# Altium PCB ART_CARD Rev 5.PcbDoc (part 4 of 13)
Units mil, origin at the board's own origin, x right, y up, seen from the top; angles counter-clockwise.
Board outline 6600.39 x 3903.54 mil, 8 copper layers (Top, Inner Layer 2, Inner Layer 3, Inner Layer 4, Inner Layer 5, Inner Layer 6, Inner Layer 7, Bottom), stack 63.111 mil thick; 542 components, 382 nets, 2410 pads, 1433 vias.
Unrouted connection lines stored in the file: 1247.
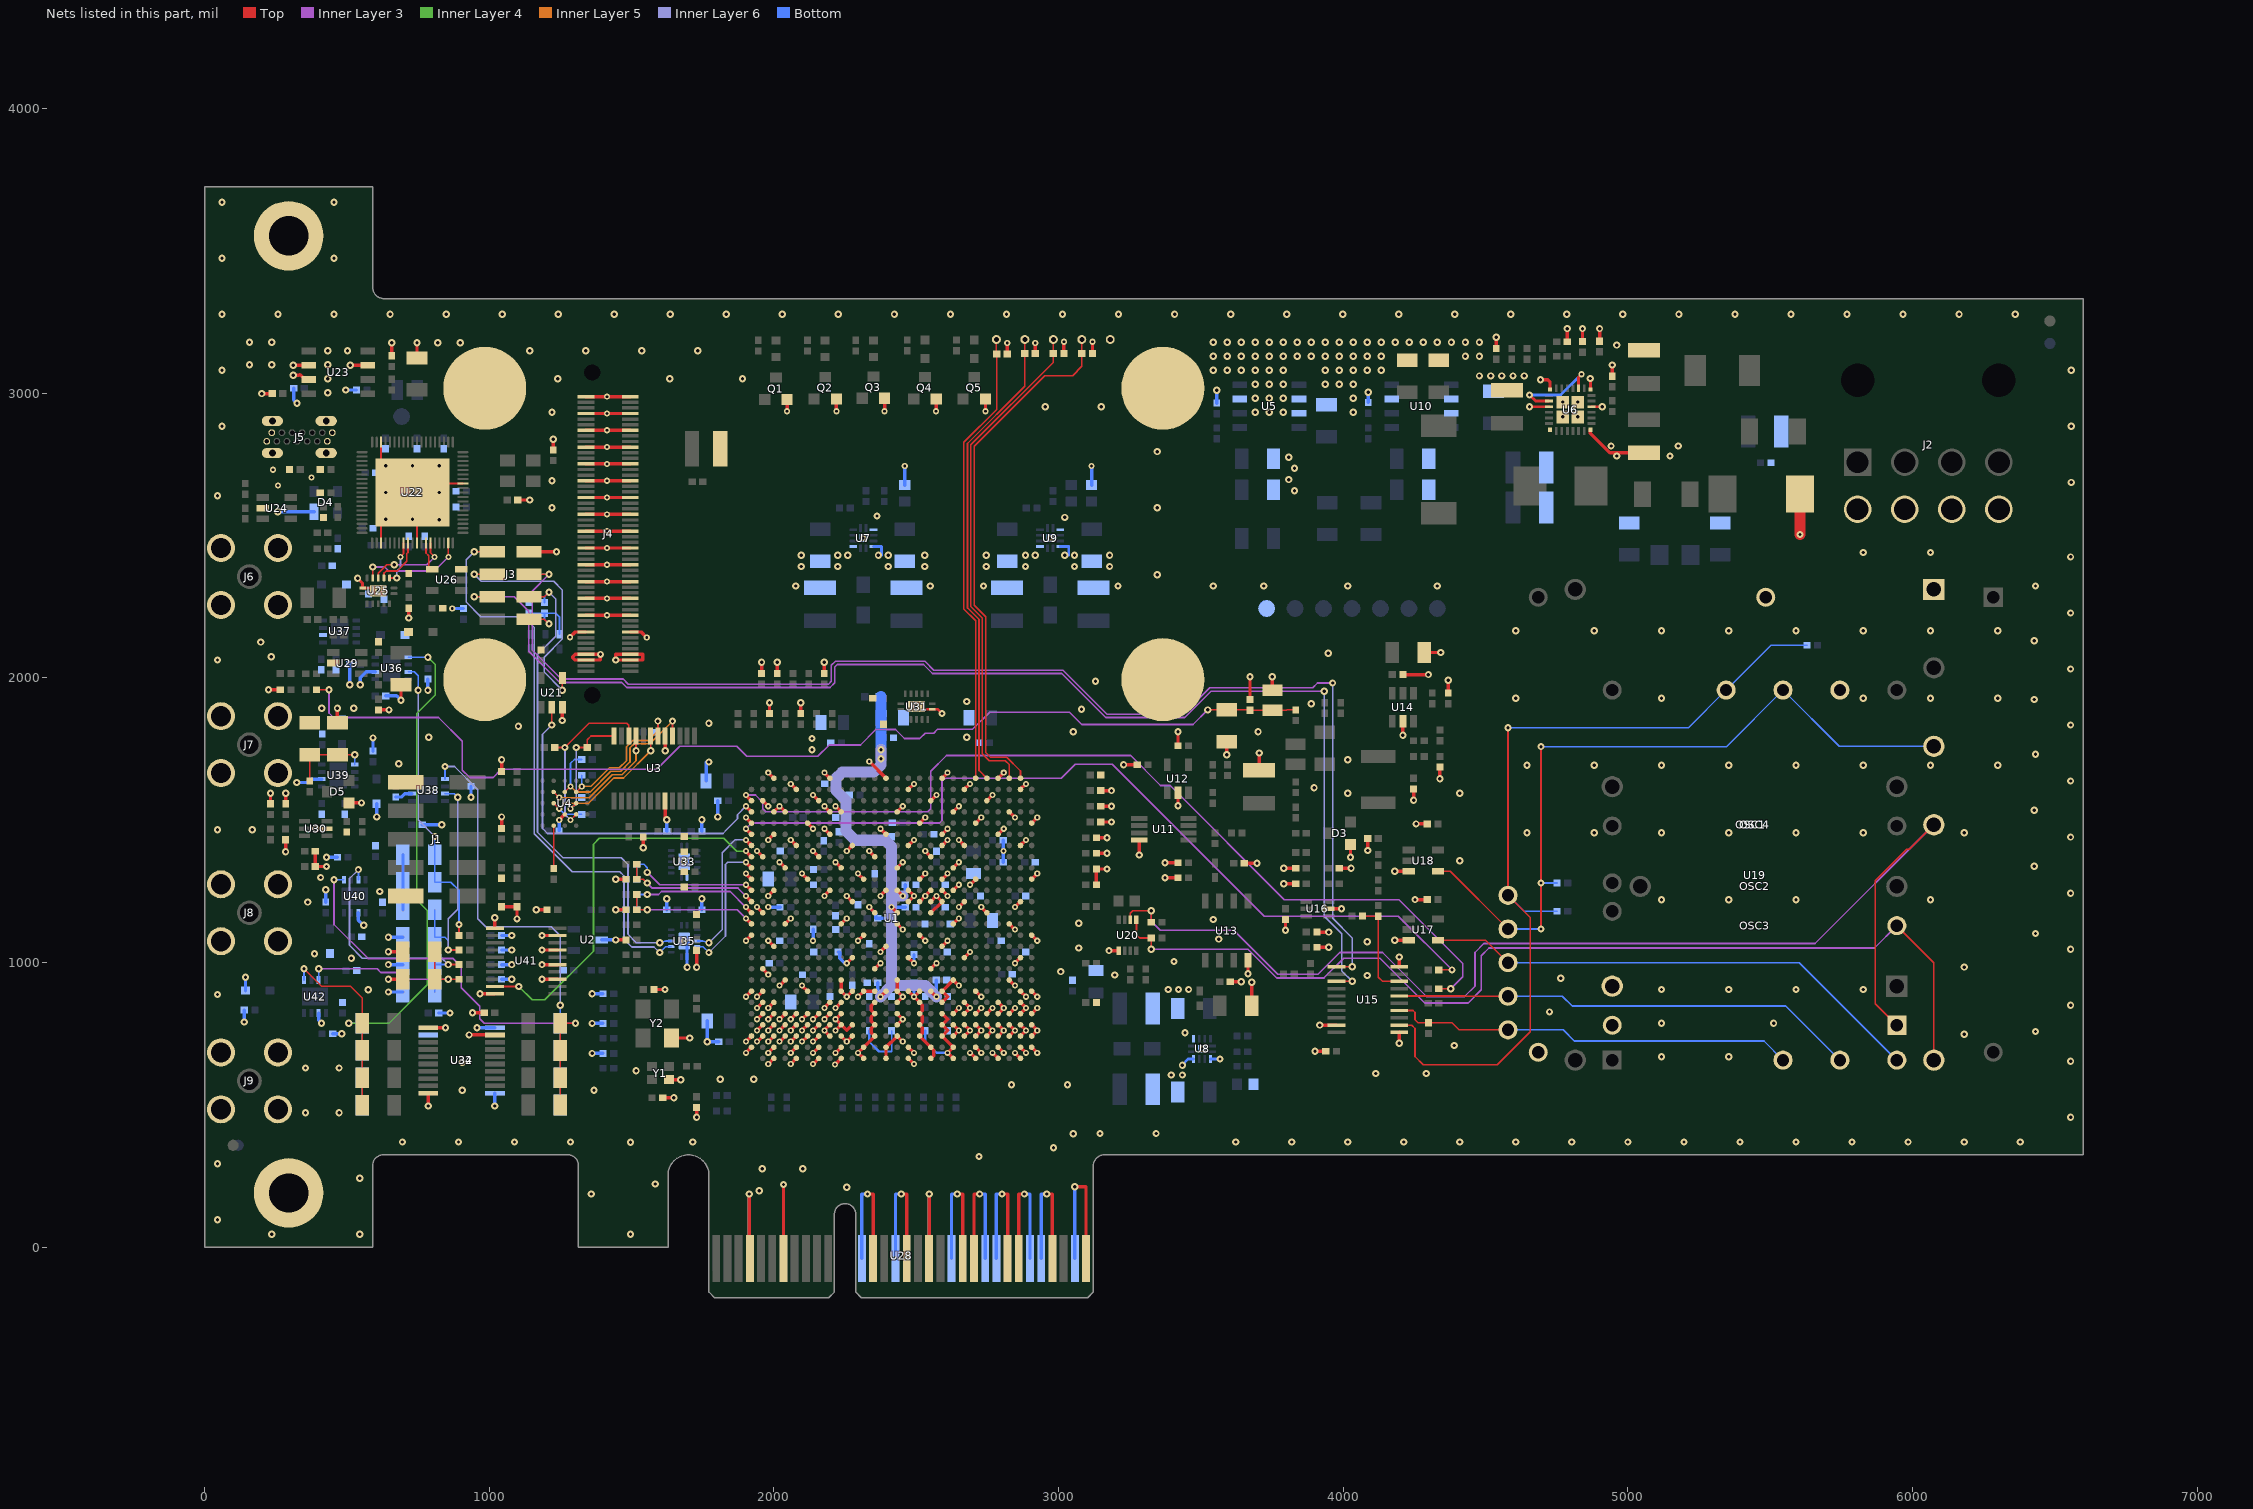
[diagram p10: the nets of this part, all layers, seen from the top]

## Via types
v1: diameter 25.59, hole 11.81, Top to Bottom, 915 vias
v2: diameter 21.65, hole 9.84, Top to Bottom, 518 vias

## Nets (pads, with @x,y where several pads share a name; then routed paths per layer and width w, separated by ;. In a path a pad name is that pad's centre, name@x,y a point inside that pad or via, vN(x,y) a via of type N, cw(c..) or ccw(c..) an arc to the next point about the centre after c; other vN are vias at no path point) (continued)
F_1.8V: C31.1 C32.1 C33.1 C34.1 C35.1 C36.1 L1.2 U1.K20 U1.N11 U1.N13 U1.P20 | length 1944.1
  Top w11.81: v2(2374.02,879.92) U1.P20@2393.7,899.61 ; v2(2413.39,1194.88) U1.N13@2433.07,1175.2 ; U1.N11@2433.07,1253.94 v2(2452.76,1234.25) ; U1.K20@2551.18,899.61 v2(2570.87,879.92)
  Inner Layer 6 w39.37: v2(2374.02,879.92) 2413.39,919.29 ; v1(2375.98,1748.03) v1(2375.98,1716.54) 2375.98,1693.9 2351.38,1669.29 2240.16,1669.29 2218.5,1647.64 2218.5,1604.33 2252.95,1569.88 2252.95,1462.6 2285.43,1430.12 2390.75,1430.12 2413.39,1407.48 2413.39,1234.25 ; v2(2452.76,1234.25) 2413.39,1234.25 ; v2(2570.87,879.92) 2531.5,919.29 2413.39,919.29 ; 2413.39,919.29 v2(2413.39,1194.88) 2413.39,1234.25
  Bottom w11.81: C32.1@2365.16,929.13 2365.16,905.51 2374.02,896.65 v2(2374.02,879.92) ; L1.2@2370.08,1934.06 L1.2@2375.98,1934.06 ; v1@2375.98,1757.87 2382.87,1764.76 C33.1@2382.87,1790.35 ; v2(2413.39,1194.88) C31.1@2461.61,1194.88 ; v2(2452.76,1234.25) 2461.61,1243.11 C34.1@2461.61,1273.62 ; C36.1@2569.88,938.98 2570.87,937.99 v2(2570.87,879.92)
  Bottom w39.37: v1(2375.98,1716.54) v1(2375.98,1748.03) 2375.98,1757.87 C35.1@2375.98,1860.24 L1.2@2375.98,1934.06
F_IN: C186.1 R161.1 R162.1 U39.5 | length 285.4
  Top w5.91: C186.1@369.09,1637.8 R162.1@369.09,1730.31 R161.1@466.54,1730.31 v1(527.56,1730.31)
  Bottom w5.91: U39.5@527.56,1695.87 v1(527.56,1730.31)
FL_CLK: R56.1 U3.10 U4.B2 | length 626.1
  Top w5.91: R56.1@1230.32,1755.91 v1(1265.75,1755.91) 1350.39,1840.55 1483.27,1840.55 1490.16,1833.66 U3.10@1490.16,1796.26 ; v2(1285.43,1500.98) U4.B2@1305.12,1520.67
  Inner Layer 6 w5.91: v1(1265.75,1755.91) 1265.75,1520.67 v2(1285.43,1500.98)
FL_CSN: R58.1 U3.12 U4.C2 | length 418.3
  Top w5.91: v2(1285.43,1540.35) U4.C2@1305.12,1560.04 ; v1(1305.12,1755.91) R58.1@1344.49,1755.91 1344.49,1783.46 1357.28,1796.26 U3.12@1438.98,1796.26
  Inner Layer 6 w5.91: v2(1285.43,1540.35) 1305.12,1560.04 v1(1305.12,1755.91)
FL_D0: R48.1 U3.4 U4.D3 | length 704.2
  Top w5.91: U4.D3@1265.75,1599.41 v2(1285.43,1619.09) ; U3.4@1643.7,1796.26 v1(1643.7,1848.43)
  Inner Layer 5 w5.91: v2(1285.43,1619.09) 1305.12,1599.41 1354.33,1599.41 1427.17,1672.24 1461.61,1672.24 1494.09,1704.72 1494.09,1753.94 1508.86,1768.7 1563.98,1768.7 v1(1643.7,1848.43)
  Bottom w5.91: v2(1285.43,1619.09) 1285.43,1699.8 1299.21,1713.58 R48.1@1324.8,1713.58
FL_D1: R51.1 U3.6 U4.D2 | length 531.1
  Top w5.91: U4.D2@1305.12,1599.41 v2(1324.8,1619.09) ; U3.6@1592.52,1796.26 v1(1592.52,1848.43)
  Inner Layer 5 w5.91: v2(1324.8,1619.09) 1357.28,1619.09 1422.24,1684.06 1456.69,1684.06 1482.28,1709.65 1482.28,1758.86 1503.94,1780.51 1559.06,1780.51 1592.52,1813.98 v1(1592.52,1848.43)
  Bottom w5.91: v2(1324.8,1619.09) R51.1@1324.8,1658.46
FL_D2: R53.1 U3.7 U4.C4 | length 572.2
  Top w5.91: U4.C4@1226.38,1560.04 v2(1246.06,1540.35) ; v1(1566.93,1744.09) U3.7@1566.93,1796.26
  Inner Layer 5 w5.91: v2(1246.06,1540.35) 1265.75,1560.04 1348.43,1560.04 1437.01,1648.62 1471.46,1648.62 v1(1566.93,1744.09)
  Bottom w5.91: v2(1246.06,1540.35) 1265.75,1520.67 R53.1@1324.8,1520.67
FL_D3: R55.1 U3.9 U4.D4 | length 516.7
  Top w5.91: U4.D4@1226.38,1599.41 v2(1246.06,1579.72) ; v1(1515.75,1744.09) U3.9@1515.75,1796.26
  Inner Layer 5 w5.91: v2(1246.06,1579.72) 1351.38,1579.72 1432.09,1660.43 1466.54,1660.43 1515.75,1709.65 v1(1515.75,1744.09)
  Bottom w5.91: v2(1246.06,1579.72) R55.1@1324.8,1579.72
FL_RSTN: R62.2 U4.A4 | length 150.6
  Top w5.91: R62.2@1226.38,1330.71 U4.A4@1226.38,1481.3
FREQ_IN: U1.AF8 U41.9 | length 1403.5
  Top w5.91: U41.9@1019.69,916.34 v1(1103.35,916.34)
  Top w11.81: v2(1901.57,1391.73) U1.AF8@1921.26,1372.05
  Inner Layer 4 w5.91: v1(1103.35,916.34) 1150.59,869.09 1194.88,869.09 1366.14,1040.35 1366.14,1416.34 1386.81,1437.01 1823.82,1437.01 1869.09,1391.73 v2(1901.57,1391.73)
FREQ_OUT: C133.2 C136.1 C172.1 L13.1 R98.2 | length 3865.7
  Top w5.91: C172.1@392.72,1958.66 v1(437.01,1958.66) ; v1(3523.62,1887.8) R98.2@3590.55,1887.8 3671.26,1887.8 C136.1@3672.24,1886.81 3672.83,1886.22 L13.1@3750.98,1886.22 3800.59,1886.22 3802.17,1887.8 C133.2@3832.68,1887.8
  Inner Layer 3 w5.91: v1(437.01,1958.66) 437.01,1876.97 452.76,1861.22 821.85,1861.22 905.51,1777.56 905.51,1676.18 931.1,1650.59 1013.78,1650.59 1042.32,1679.13 1588.58,1679.13 1669.29,1759.84 1869.09,1759.84 1904.53,1724.41 2153.54,1724.41 2193.9,1764.76 2304.13,1764.76 2358.27,1818.9 2427.17,1818.9 2458.66,1787.4 2512.8,1787.4 2531.5,1806.1 2561.02,1806.1 2574.8,1819.88 2697.83,1819.88 2757.87,1879.92 3038.39,1879.92 3081.69,1836.61 3472.44,1836.61 v1(3523.62,1887.8)
GND: C1.2 C2.2 C3.2 C4.2 C5.2 C6.2 C7.2 C8.2 C9.2 C10.2 C11.2 C12.2 C13.2 C14.2 C15.2 C16.2 C17.2 C18.2 C19.2 C20.2 C21.2 C22.2 C23.2 C24.2 C25.2 C26.2 C27.2 C28.2 C29.2 C30.2 C31.2 C32.2 C33.2 C34.2 C35.2 C36.2 C37.2 C38.2 C39.2 C40.2 C41.2 C42.2 C43.2 C44.2 C45.2 C46.2 C47.2 C48.2 C49.2 C50.2 C51.2 C52.2 C53.2 C54.2 C55.2 C56.2 C57.2 C58.2 C59.2 C60.2 C61.2 C62.2 C63.2 C64.2 C65.2 C66.2 C67.2 C68.2 C69.2 C70.2 C71.2 C72.2 C73.2 C74.2 C75.2 C76.2 C77.2 C78.2 C79.2 C80.2 C81.2 C82.2 C83.2 C84.2 C85.2 C86.2 C87.2 C88.2 C89.2 C90.2 C91.2 C93.2 C94.2 C95.2 C96.2 C97.2 C98.2 C100.2 C101.2 C103.2 C104.2 C105.2 C106.2 C107.2 C108.2 C110.2 C111.2 C112.2 C113.2 C114.2 C115.2 C116.2 C117.2 C118.2 C119.2 C120.2 C121.2 C122.2 C123.2 C124.2 C125.2 C126.2 C127.2 C128.2 C130.2 C131.2 C134.2 C135.2 C136.2 C137.2 C139.2 C140.2 C141.2 C143.2 C144.2 C145.2 C146.2 C147.2 C148.2 C149.2 C150.2 C151.2 C152.2 C153.2 C154.2 C155.2 C156.2 C157.2 C158.2 C159.2 C160.2 C161.2 C162.2 C163.2 C164.2 C165.2 C166.2 C167.2 C168.2 C169.2 C170.2 C171.2 C175.2 C184.2 C185.2 C187.2 C188.2 C189.2 C190.2 C191.2 C192.2 C193.2 C194.2 C195.2 C196.2 C197.2 C198.2 C199.2 C200.2 C201.2 C202.2 C203.2 C204.2 C205.2 C206.2 C207.2 C208.2 C209.2 C210.2 C211.2 C212.2 C213.2 C214.2 C215.2 C216.2 C217.2 C218.2 C219.2 C220.2 C221.2 C222.2 D3.1 D4.1 D5.1 D6.1 D7.1 H1.1 H2.1 HE1.1 HE2.1 HE3.1 HE4.1 J1.2 J1.10 J2.5 J2.6 J2.7 J2.8 J3.8 J4.1 J4.2 J4.7 J4.8 J4.13 J4.14 J4.19 J4.20 J4.25 J4.26 J4.31 J4.32 J4.37 J4.38 J4.43 J4.44 J4.49 J4.50 J4.55 J4.56 J4.61 J4.62 J4.67 J4.68 J4.73 J4.74 J4.79 J4.80 J4.85 J4.86 J4.93 J4.94 J4.95 J4.96 J5.A1 J5.A12 J5.B1 J5.B12 J5.C1 J5.C2 J5.C3 J5.C4 J6.2 J6.3 J6.4 J6.5 J7.2 J7.3 J7.4 J7.5 J8.2 J8.3 J8.4 J8.5 J9.2 J9.3 J9.4 J9.5 J10.2 L13.2 OSC1.2 OSC1.4 OSC2.6 OSC3.5 OSC4.1 PD3.1 Q1.2 Q2.2 Q3.2 Q4.2 Q5.2 R6.1 R7.1 R9.1 R13.1 R24.2 R25.2 R26.2 R27.2 R28.2 R29.2 R30.2 R31.2 R41.2 R42.2 R43.2 R44.2 R46.1 R47.1 R50.1 R52.1 R54.1 R57.1 R59.1 R60.1 R61.1 R66.2 R67.2 R70.2 R71.2 R73.2 R76.2 R79.2 R82.2 R89.1 R96.2 R98.1 R114.2 R115.2 R116.2 R124.1 R125.2 R126.2 R129.1 R132.2 R136.2 R139.1 R148.2 R158.2 R159.2 R160.2 R161.2 R162.2 R179.1 R180.1 R181.1 R182.1 R183.1 R184.1 R186.2 R187.2 R188.2 R190.2 R191.2 R192.2 R194.2 R195.2 R196.2 R198.2 R199.2 R200.2 TP5.1 U1.A5 U1.A10 U1.A15 U1.A20 U1.A22 U1.A23 U1.A24 U1.A25 U1.AA5 U1.AA10 U1.AA20 U1.AA22 U1.AA23 U1.AA24 U1.AB2 U1.AB7 U1.AB22 U1.AB23 U1.AB24 U1.AB25 U1.AB26 U1.AC4 U1.AC9 U1.AC14 U1.AC19 U1.AC22 U1.AC23 U1.AC24 U1.AD1 U1.AD4 U1.AD6 U1.AD11 U1.AD16 U1.AD21 U1.AD22 U1.AD23 U1.AD24 U1.AD25 U1.AD26 U1.AE3 U1.AE8 U1.AE13 U1.AE18 U1.AE20 U1.AE21 U1.AE22 U1.AE23 U1.AE24 U1.AF5 U1.AF10 U1.AF15 U1.AF20 U1.AF24 U1.AF25 U1.B2 U1.B7 U1.B12 U1.B17 U1.B20 U1.B21 U1.B22 U1.B23 U1.B24 U1.B25 U1.B26 U1.C4 U1.C14 U1.C19 U1.C22 U1.C23 U1.C24 U1.D1 U1.D6 U1.D21 U1.D22 U1.D23 U1.D24 U1.D25 U1.D26 U1.E3 U1.E13 U1.E22 U1.E23 U1.E24 U1.F5 U1.F10 U1.F20 U1.F22 U1.F23 U1.F24 U1.F25 U1.F26 U1.G2 U1.G7 U1.G12 U1.G17 U1.G21 U1.G22 U1.G23 U1.G24 U1.H4 U1.H9 U1.H11 U1.H14 U1.H19 U1.H22 U1.H23 U1.H24 U1.H25 U1.H26 U1.J1 U1.J6 U1.J7 U1.J10 U1.J11 U1.J12 U1.J16 U1.J20 U1.J21 U1.J22 U1.J23 U1.J24 U1.K3 U1.K8 U1.K11 U1.K12 U1.K13 U1.K18 U1.K25 U1.K26 U1.L5 U1.L10 U1.L12 U1.L15 U1.L20 U1.L21 U1.L22 U1.L23 U1.L24 U1.M2 U1.M7 U1.M11 U1.M12 U1.M17 U1.M20 U1.M25 U1.M26 U1.N4 U1.N9 U1.N14 U1.N19 U1.N20 U1.N21 U1.N22 U1.N23 U1.N24 U1.P1 U1.P6 U1.P11 U1.P16 U1.P25 U1.P26 U1.R8 U1.R13 U1.R18 U1.R20 U1.R21 U1.R22 U1.R23 U1.R24 U1.T10 U1.T15 U1.T20 U1.T25 U1.T26 U1.U7 U1.U12 U1.U17 U1.U20 U1.U23 U1.U24 U1.V4 U1.V9 U1.V14 U1.V19 U1.V20 U1.V21 U1.V22 U1.V23 U1.V24 U1.V25 U1.V26 U1.W1 U1.W4 U1.W6 U1.W11 U1.W21 U1.W22 U1.W23 U1.W24 U1.Y3 U1.Y8 U1.Y22 U1.Y23 U1.Y24 U1.Y25 U1.Y26 U2.2 U3.5 U3.20 U4.B3 U5.3 U5.6 U5.7 U6.3 U6.16 U6.25 U6.26 U6.27 U6.28 U6.29 U6.30 U6.31 U6.32 U7.1 U7.4 U7.7 U7.13 U8.1 U8.4 U8.7 U8.13 U9.1 U9.4 U9.7 U9.13 U10.3 U10.6 U10.7 U11.8 U12.2 U13.4 U14.2 U15.1 U15.10 U15.19 U16.2 U17.3 U18.3 U19.8 U20.1 U21.3 U22.3 U22.11 U22.31 U22.55 U22.77 U23.3 U23.6 U23.7 U24.2 U25.7 U25.PAD U26.3 U28.A4 U28.A12 U28.A15 U28.A18 U28.A20 U28.A23 U28.A24 U28.A27 U28.A28 U28.A31 U28.B4 U28.B7 U28.B13 U28.B16 U28.B18 U28.B21 U28.B22 U28.B25 U28.B26 U28.B29 U28.B32 U29.2 U30.2 U31.7 U31.PAD U32.1 U32.10 U32.19 U33.7 U33.PAD U34.1 U34.10 U34.19 U35.7 U35.PAD U36.2 U37.2 U38.2 U39.2 U40.2 U41.1 U41.10 U41.13 U41.15 U41.17 U41.19 U42.2 VR1.2 VR2.2 VR3.2 VR4.2 VR5.2 VR6.2 Y1.2 Y2.2 | length 25010.1
  Top w7.87: U22.3@620.08,2474.41 620.08,2557.09 U22.77@620.08,2651.57 ; U22.55@620.08,2828.74 620.08,2746.06 U22.77@620.08,2651.57 ; U22.11@746.06,2474.41 746.06,2557.09 746.06,2651.57 v1(730.32,2651.57) ; U22.31@907.48,2683.07 730.32,2683.07 v1(730.32,2651.57) ; U22.77@620.08,2651.57 v1(635.83,2651.57) v1(730.32,2651.57)
  Top w9.84: v1(537.4,2350.39) 555.12,2332.68 U25.7@555.12,2315.94 624.02,2315.94 v2(610.24,2306.1) ; v2(2500.98,1899.61) 2500.98,1889.76 U31.7@2556.1,1889.76 2575.79,1889.76 v1(2590.55,1875) ; v1(4654.53,2952.76) U6.3@4722.44,2952.76 ; U6.31@4868.11,3013.78 v1(4868.11,3052.17) ; U6.16@4872.05,2952.76 v1(4909.45,2952.76)
  Top w11.81: v1(200.79,2999.02) C163.2@237.2,2999.02 ; v1(224.41,1958.66) R148.2@265.75,1958.66 ; R158.2@231.3,1558.07 v1(231.3,1594.49) ; v1(284.45,1389.76) R160.2@284.45,1432.09 ; C187.2@285.43,1558.07 v1(285.43,1594.49) ; v1(311.02,3062.99) 331.5,3062.99 333.46,3064.96 335.24,3064.96 351.38,3048.82 U23.7@365.16,3048.82 ; v1(311.02,3098.43) 331.69,3098.43 332.09,3098.82 U23.6@365.16,3098.82 ; C185.2@388.78,1390.75 C184.2@388.78,1337.6 v1(428.15,1337.6) ; v1(390.75,1470.47) U30.2@430.12,1470.47 ; R161.2@466.54,1842.52 v1(466.54,1893.7) ; D5.1@506.89,1561.02 v1(551.18,1561.02) ; v1(511.81,3098.43) 512.2,3098.82 U23.3@573.82,3098.82 ; C175.2@611.22,1887.8 v1(647.64,1887.8) ; v1(645.67,941.93) R199.2@696.85,941.93 ; v1(645.67,1038.39) R198.2@696.85,1038.39 ; R136.2@657.48,3131.89 v1(657.48,3177.17) ; v1(689.96,1921.26) C171.2@689.96,1976.38 ; v1(717.52,2210.63) C169.2@717.52,2245.08 ; C164.2@746.06,3124.02 v1(746.06,3177.17) ; v1(785.43,496.06) 785.43,541.14 U34.10@785.63,541.34 ; U34.1@785.63,771.65 v1(846.46,771.65) ; v1(929.13,746.06) U34.19@1019.49,746.06 ; v1(940.94,823.82) C205.2@982.28,823.82 ; v1(967.52,890.75) U41.10@1019.69,890.75 ; U41.1@1019.69,1121.06 v1(1019.69,1157.48) ; C79.2@1043.31,1195.87 R42.2@1097.44,1195.87 v1(1097.44,1153.54) ; C82.2@1043.31,1471.46 v1(1043.31,1511.81) ; C78.2@1043.31,1671.26 v1(1043.31,1712.6) ; C166.2@1100.39,2625 v1(1141.73,2625) ; J3.8@1139.17,2442.91 v1(1236.22,2442.91) ; v1(1165.35,1186.02) C218.2@1202.76,1186.02 ; v1(1185.04,941.93) U41.13@1240.16,941.93 ; v1(1185.04,993.11) U41.15@1240.16,993.11 ; v1(1185.04,1044.29) U41.17@1240.16,1044.29 ; v1(1185.04,1095.47) U41.19@1240.16,1095.47 ; C165.2@1224.41,2801.18 v1(1224.41,2838.58) ; v2(1246.06,1500.98) U4.B3@1265.75,1520.67 ; v1(1256.89,1850.39) U21.3@1256.89,1897.64 ; v2(1283.46,2142.72) 1302.17,2161.42 J4.85@1339.57,2161.42 ; J4.79@1339.57,2220.47 v2(1413.39,2220.47) J4.80@1495.08,2220.47 ; J4.73@1339.57,2279.53 v2(1413.39,2279.53) J4.74@1495.08,2279.53 ; J4.67@1339.57,2338.58 1341.54,2338.58 v2(1413.39,2338.58) J4.68@1495.08,2338.58 ; J4.61@1339.57,2397.64 v2(1413.39,2397.64) J4.62@1495.08,2397.64 ; J4.55@1339.57,2456.69 v2(1413.39,2456.69) J4.56@1495.08,2456.69 ; J4.49@1339.57,2515.75 v2(1413.39,2515.75) J4.50@1495.08,2515.75 ; J4.43@1339.57,2574.8 v2(1413.39,2574.8) J4.44@1495.08,2574.8 ; J4.37@1339.57,2633.86 v2(1413.39,2633.86) J4.38@1495.08,2633.86 ; J4.31@1339.57,2692.91 v2(1413.39,2692.91) J4.32@1495.08,2692.91 ; J4.25@1339.57,2751.97 v2(1413.39,2751.97) J4.26@1495.08,2751.97 ; J4.19@1339.57,2811.02 v2(1413.39,2811.02) J4.20@1495.08,2811.02 ; J4.13@1339.57,2870.08 v2(1413.39,2870.08) J4.14@1495.08,2870.08 ; J4.7@1339.57,2929.13 v2(1413.39,2929.13) J4.8@1495.08,2929.13 ; J4.1@1339.57,2988.19 v2(1413.39,2988.19) J4.2@1495.08,2988.19 ; v1(1443.9,1079.72) R27.2@1480.32,1079.72 ; v1(1443.9,1186.02) R28.2@1480.32,1186.02 ; v1(1443.9,1293.31) R30.2@1480.32,1293.31 ; J4.86@1495.08,2161.42 1533.46,2161.42 v2(1553.15,2141.73) ; v1(1541.34,1403.54) R47.1@1541.34,1440.94 ; C85.2@1578.74,905.51 v1(1617.13,905.51) ; C80.2@1609.25,525.59 v1(1648.62,525.59) ; U3.20@1618.11,1567.91 1618.11,1506.89 v1(1623.03,1501.97) ; v1(1618.11,1744.09) U3.5@1618.11,1796.26 ; Y1.2@1630.91,588.58 v1(1672.24,588.58) ; Y2.2@1640.55,735.24 v1(1704.72,735.24) ; v1(1728.35,456.69) R46.1@1728.35,491.14 ; v1(1728.35,983.27) R184.1@1728.35,1043.31 ; v2(1901.57,683.07) U1.AF25@1921.26,702.76 ; v2(1901.57,722.44) U1.AF24@1921.26,742.13 ; v2(1901.57,879.92) U1.AF20@1921.26,899.61 ; v2(1901.57,1076.77) U1.AF15@1921.26,1096.46 ; v2(1901.57,1312.99) U1.AF10@1921.26,1293.31 ; v2(1901.57,1509.84) U1.AF5@1921.26,1490.16 ; v1(1913.39,187.01) 1913.39,-39.37 U28.B4@1915.35,-39.37 ; v2(1940.94,722.44) U1.AE24@1960.63,742.13 ; v2(1940.94,761.81) U1.AE23@1960.63,781.5 ; v2(1940.94,801.18) U1.AE22@1960.63,820.87 ; v2(1940.94,840.55) U1.AE21@1960.63,860.24 ; v2(1940.94,879.92) U1.AE20@1960.63,899.61 ; v2(1940.94,1194.88) U1.AE13@1960.63,1175.2 ; v2(1940.94,1391.73) U1.AE8@1960.63,1372.05 ; R13.1@1956.69,2015.75 v1(1956.69,2055.12) ; U1.AE18@1960.63,978.35 v2(1980.32,957.68) ; U1.AE3@1960.63,1568.9 v2(1980.32,1549.21) ; v2(1980.32,643.7) U1.AD26@2000,663.39 ; v2(1980.32,683.07) U1.AD25@2000,702.76 ; v2(1980.32,722.44) U1.AD24@2000,742.13 ; v2(1980.32,761.81) U1.AD23@2000,781.5 ; v2(1980.32,801.18) U1.AD22@2000,820.87 ; v2(1980.32,840.55) U1.AD21@2000,860.24 ; v2(1980.32,1076.77) U1.AD16@2000,1057.09 ; v2(1980.32,1234.25) U1.AD11@2000,1253.94 ; v2(1980.32,1431.1) U1.AD6@2000,1450.79 ; v2(1980.32,1667.32) U1.AD1@2000,1647.64 ; R43.2@1984.25,1875 v1(1984.25,1913.39) ; U1.AD4@2000,1529.53 v2(2019.69,1549.21) U1.AC4@2039.37,1529.53 ; R41.2@2011.81,2015.75 v1(2011.81,2055.12) ; v2(2019.69,722.44) U1.AC24@2039.37,742.13 ; v2(2019.69,761.81) U1.AC23@2039.37,781.5 ; v2(2019.69,801.18) U1.AC22@2039.37,820.87 ; v2(2019.69,919.29) U1.AC19@2039.37,938.98 ; v2(2019.69,1352.36) U1.AC9@2039.37,1332.68 ; U28.B7@2033.46,-39.37 v1(2033.46,220.47) ; U1.AC14@2039.37,1135.83 v2(2059.06,1155.51) ; v2(2046.26,2937.01) Q1.2@2046.26,2978.35 ; v2(2059.06,643.7) U1.AB26@2078.74,663.39 ; v2(2059.06,683.07) U1.AB25@2078.74,702.76 ; v2(2059.06,722.44) U1.AB24@2078.74,742.13 ; v2(2059.06,761.81) U1.AB23@2078.74,781.5 ; v2(2059.06,801.18) U1.AB22@2078.74,820.87 ; v2(2059.06,1431.1) U1.AB7@2078.74,1411.42 ; v2(2059.06,1627.95) U1.AB2@2078.74,1608.27 ; R44.2@2094.49,1875 v1(2094.49,1913.39) ; v2(2098.43,722.44) U1.AA24@2118.11,742.13 ; v2(2098.43,761.81) U1.AA23@2118.11,781.5 ; v2(2098.43,801.18) U1.AA22@2118.11,820.87 ; v2(2098.43,919.29) U1.AA20@2118.11,899.61 ; v2(2098.43,1312.99) U1.AA10@2118.11,1293.31 ; U1.AA5@2118.11,1490.16 v2(2137.8,1470.47) ; v2(2137.8,643.7) U1.Y26@2157.48,663.39 ; v2(2137.8,683.07) U1.Y25@2157.48,702.76 ; v2(2137.8,722.44) U1.Y24@2157.48,742.13 ; v2(2137.8,761.81) U1.Y23@2157.48,781.5 ; v2(2137.8,801.18) U1.Y22@2157.48,820.87 ; v2(2137.8,1391.73) U1.Y8@2157.48,1372.05 ; v2(2137.8,1588.58) U1.Y3@2157.48,1568.9 ; v2(2177.17,801.18) U1.W22@2196.85,820.87 ; v2(2177.17,840.55) U1.W21@2196.85,860.24 ; v2(2177.17,1234.25) U1.W11@2196.85,1253.94 ; v2(2177.17,1470.47) U1.W6@2196.85,1450.79 ; v2(2177.17,1549.21) U1.W4@2196.85,1529.53 ; v2(2177.17,1667.32) U1.W1@2196.85,1647.64 ; R9.1@2177.17,2015.75 v1(2177.17,2055.12) ; U1.W24@2196.85,742.13 v2(2177.17,761.81) U1.W23@2196.85,781.5 ; v2(2214.57,641.73) U1.V26@2236.22,663.39 ; v2(2216.54,683.07) U1.V25@2236.22,702.76 ; v2(2216.54,761.81) U1.V23@2236.22,781.5 ; v2(2216.54,840.55) U1.V21@2236.22,860.24 ; v2(2216.54,1352.36) U1.V9@2236.22,1332.68 ; v2(2216.54,1549.21) U1.V4@2236.22,1529.53 ; v2(2219.49,2937.01) Q2.2@2219.49,2980.31 ; U1.V24@2236.22,742.13 v2(2255.91,722.44) U1.U24@2275.59,742.13 ; U1.V22@2236.22,820.87 v2(2216.54,801.18) U1.V23@2236.22,781.5 ; U1.V19@2236.22,938.98 U1.V20@2236.22,899.61 v2(2255.91,879.92) U1.U20@2275.59,899.61 ; U1.V14@2236.22,1135.83 v2(2255.91,1155.51) ; v2(2255.91,998.03) U1.U17@2275.59,1017.72 ; v2(2255.91,1234.25) U1.U12@2275.59,1214.57 ; v2(2255.91,1391.73) U1.U7@2275.59,1411.42 ; U1.U23@2275.59,781.5 2255.91,761.81 U1.V23@2236.22,781.5 ; v2(2295.28,879.92) U1.T20@2314.96,899.61 U1.R20@2354.33,899.61 ; v2(2295.28,1076.77) U1.T15@2314.96,1096.46 ; v2(2295.28,1312.99) U1.T10@2314.96,1293.31 ; U1.T26@2314.96,663.39 v2(2295.28,683.07) U1.T25@2314.96,702.76 U1.R24@2354.33,742.13 2342.52,753.94 2342.52,769.69 U1.R23@2354.33,781.5 2342.52,793.31 2342.52,809.06 U1.R22@2354.33,820.87 2342.52,832.68 2342.52,848.43 U1.R21@2354.33,860.24 ; v1(2328.74,187.01) 2348.43,187.01 U28.B13@2348.43,-39.37 ; v2(2334.65,1194.88) U1.R13@2354.33,1175.2 ; v2(2334.65,1391.73) U1.R8@2354.33,1372.05 ; v2(2334.65,1706.69) U1.P1@2393.7,1647.64 ; U1.R18@2354.33,978.35 v2(2374.02,998.03) ; v2(2374.02,1037.4) U1.P16@2393.7,1057.09 ; v2(2374.02,1234.25) U1.P11@2393.7,1253.94 ; v2(2374.02,1470.47) U1.P6@2393.7,1450.79 ; v2(2388.78,2937.01) Q3.2@2388.78,2982.28 ; U1.P26@2393.7,663.39 U1.P25@2393.7,702.76 U1.N24@2433.07,742.13 v2(2452.76,722.44) ; U1.N23@2433.07,781.5 v2(2452.76,801.18) U1.N22@2433.07,820.87 ; U1.N21@2433.07,860.24 v2(2452.76,879.92) U1.N20@2433.07,899.61 U1.N19@2433.07,938.98 ; U1.N14@2433.07,1135.83 v2(2452.76,1116.14) ; U1.N9@2433.07,1332.68 v2(2452.76,1352.36) ; U1.N4@2433.07,1529.53 v2(2452.76,1549.21) ; v1(2446.85,187.01) 2466.54,187.01 U28.B16@2466.54,-39.37 ; U1.M26@2472.44,663.39 v2(2492.13,643.7) ; U1.M25@2472.44,702.76 v2(2492.13,683.07) ; U1.M20@2472.44,899.61 v2(2492.13,879.92) ; U1.M17@2472.44,1017.72 v2(2492.13,998.03) ; U1.M12@2472.44,1214.57 v2(2492.13,1234.25) U1.M11@2472.44,1253.94 ; U1.M7@2472.44,1411.42 v2(2492.13,1431.1) ; U1.M2@2472.44,1608.27 v2(2492.13,1627.95) ; U1.L20@2511.81,899.61 v2(2492.13,879.92) ; U1.L15@2511.81,1096.46 v2(2531.5,1076.77) ; U1.L12@2511.81,1214.57 v2(2531.5,1234.25) U1.K11@2551.18,1253.94 ; U1.L10@2511.81,1293.31 v2(2531.5,1312.99) ; U1.L5@2511.81,1490.16 v2(2531.5,1509.84) ; v2(2531.5,1391.73) U1.K8@2551.18,1372.05 ; U28.B18@2545.28,-39.37 v1(2545.28,187.01) ; U1.K26@2551.18,663.39 2561.02,673.23 2561.02,683.07 2561.02,692.91 U1.K25@2551.18,702.76 U1.L24@2511.81,742.13 2521.65,751.97 2521.65,761.81 2521.65,771.65 U1.L23@2511.81,781.5 2521.65,791.34 2521.65,801.18 2521.65,811.02 U1.L22@2511.81,820.87 2521.65,830.71 2521.65,840.55 2521.65,850.39 U1.L21@2511.81,860.24 v2(2492.13,879.92) ; U1.K18@2551.18,978.35 v2(2570.87,998.03) ; U1.K13@2551.18,1175.2 U1.J12@2590.55,1214.57 v2(2570.87,1234.25) U1.K12@2551.18,1214.57 ; U1.K3@2551.18,1568.9 v2(2570.87,1588.58) ; v2(2569.88,2937.01) Q4.2@2569.88,2980.31 ; U1.J22@2590.55,820.87 2610.24,801.18 U1.J23@2590.55,781.5 2610.24,761.81 U1.J24@2590.55,742.13 U1.H25@2629.92,702.76 v2(2610.24,683.07) U1.H26@2629.92,663.39 ; U1.J21@2590.55,860.24 2610.24,879.92 U1.J20@2590.55,899.61 U1.H19@2629.92,938.98 v2(2649.61,919.29) ; U1.J16@2590.55,1057.09 v2(2610.24,1076.77) ; U1.J11@2590.55,1253.94 v2(2610.24,1234.25) ; U1.J10@2590.55,1293.31 v2(2610.24,1312.99) ; U1.J7@2590.55,1411.42 v2(2610.24,1431.1) ; U1.J6@2590.55,1450.79 v2(2610.24,1470.47) ; U1.J1@2590.55,1647.64 v2(2610.24,1667.32) ; U1.H24@2629.92,742.13 v2(2649.61,761.81) U1.H23@2629.92,781.5 ; U1.H22@2629.92,820.87 v2(2649.61,840.55) ; U1.H14@2629.92,1135.83 v2(2649.61,1155.51) ; U1.H11@2629.92,1253.94 v2(2649.61,1273.62) ; U1.H9@2629.92,1332.68 v2(2649.61,1352.36) ; U1.H4@2629.92,1529.53 v2(2649.61,1549.21) ; v1(2643.7,187.01) 2663.39,187.01 U28.B21@2663.39,-39.37 ; v2(2649.61,1194.88) U1.G12@2669.29,1214.57 ; v2(2649.61,1431.1) U1.G7@2669.29,1411.42 ; U1.G24@2669.29,742.13 v2(2688.98,761.81) U1.G23@2669.29,781.5 ; U1.G22@2669.29,820.87 v2(2688.98,840.55) U1.G21@2669.29,860.24 ; U1.G17@2669.29,1017.72 v2(2688.98,1037.4) ; U1.G2@2669.29,1608.27 v2(2688.98,1627.95) ; v2(2688.98,683.07) U1.F26@2708.66,663.39 ; v2(2688.98,1273.62) U1.F10@2708.66,1293.31 ; U28.B22@2702.76,-39.37 2702.76,187.01 v1(2722.44,187.01) ; U1.F25@2708.66,702.76 v2(2728.35,683.07) ; U1.F24@2708.66,742.13 v2(2728.35,761.81) U1.F23@2708.66,781.5 ; U1.F22@2708.66,820.87 v2(2728.35,840.55) ; U1.F20@2708.66,899.61 v2(2728.35,879.92) ; U1.F5@2708.66,1490.16 v2(2728.35,1509.84) ; v2(2728.35,1194.88) U1.E13@2748.03,1175.2 ; v2(2743.11,2937.01) Q5.2@2743.11,2980.31 ; U1.E24@2748.03,742.13 v2(2767.72,761.81) U1.E23@2748.03,781.5 ; U1.E22@2748.03,820.87 v2(2767.72,840.55) ; U1.E3@2748.03,1568.9 v2(2767.72,1588.58) ; v2(2767.72,683.07) U1.D26@2787.4,663.39 ; U1.D25@2787.4,702.76 v2(2807.09,683.07) ; U1.D24@2787.4,742.13 v2(2807.09,761.81) U1.D23@2787.4,781.5 ; U1.D22@2787.4,820.87 v2(2807.09,840.55) U1.D21@2787.4,860.24 ; U1.D6@2787.4,1450.79 v2(2807.09,1470.47) ; U1.D1@2787.4,1647.64 v2(2807.09,1667.32) ; v1(2801.18,187.01) 2820.87,187.01 U28.B25@2820.87,-39.37 ; C193.2@2819.88,3137.8 v2(2819.88,3177.17) ; U1.C24@2826.77,742.13 v2(2846.46,761.81) U1.C23@2826.77,781.5 ; U1.C22@2826.77,820.87 v2(2846.46,840.55) ; U1.C19@2826.77,938.98 v2(2846.46,919.29) ; U1.C14@2826.77,1135.83 v2(2846.46,1116.14) ; U1.C4@2826.77,1529.53 v2(2846.46,1509.84) ; v2(2846.46,683.07) U1.B26@2866.14,663.39 ; v2(2846.46,998.03) U1.B17@2866.14,1017.72 ; v2(2846.46,1194.88) U1.B12@2866.14,1214.57 ; U28.B26@2860.24,-39.37 2860.24,187.01 v1(2879.92,187.01) ; U1.B25@2866.14,702.76 v2(2885.83,683.07) ; U1.B24@2866.14,742.13 v2(2885.83,761.81) U1.B23@2866.14,781.5 ; U1.B22@2866.14,820.87 v2(2885.83,840.55) U1.B21@2866.14,860.24 ; U1.B20@2866.14,899.61 v2(2885.83,879.92) ; U1.B7@2866.14,1411.42 v2(2885.83,1431.1) ; U1.B2@2866.14,1608.27 v2(2885.83,1627.95) ; U1.A25@2905.51,702.76 v2(2925.2,683.07) ; U1.A24@2905.51,742.13 v2(2925.2,761.81) U1.A23@2905.51,781.5 ; U1.A22@2905.51,820.87 v2(2925.2,840.55) ; U1.A20@2905.51,899.61 v2(2925.2,879.92) ; U1.A15@2905.51,1096.46 v2(2925.2,1076.77) ; U1.A10@2905.51,1293.31 v2(2925.2,1312.99) ; U1.A5@2905.51,1490.16 v2(2925.2,1509.84) ; C194.2@2918.31,3139.76 v2(2918.31,3177.17) ; v1(2958.66,187.01) 2978.35,187.01 U28.B29@2978.35,-39.37 ; C195.2@3018.7,3139.76 v2(3018.7,3181.1) ; v1(3057.09,212.6) 3096.46,212.6 U28.B32@3096.46,-39.37 ; C196.2@3119.09,3139.76 v2(3119.09,3181.1) ; R54.1@3132.87,1273.62 R59.1@3132.87,1328.74 v1(3170.28,1328.74) ; R61.1@3132.87,1383.86 v1(3170.28,1383.86) ; R60.1@3132.87,1438.98 v1(3170.28,1438.98) ; R7.1@3148.62,1494.09 v1(3186.02,1494.09) ; R6.1@3148.62,1549.21 v1(3186.02,1549.21) ; R57.1@3148.62,1604.33 v1(3186.02,1604.33) ; v1(3177.17,1042.32) U20.1@3210.63,1042.32 ; v1(3228.35,1694.88) C121.2@3276.57,1694.88 ; v1(3283.46,1377.95) U11.8@3283.46,1430.12 ; v1(3374.02,1298.23) C123.2@3419.29,1298.23 ; v1(3374.02,1350.39) C124.2@3419.29,1350.39 ; v1(3419.29,1551.18) U12.2@3419.29,1596.46 ; R89.1@3419.29,1761.81 v1(3419.29,1811.02) ; v1(3590.55,1730.31) R98.1@3590.55,1775.59 ; C126.2@3603.35,933.07 v1(3641.73,933.07) ; C127.2@3652.56,1349.41 v1(3696.85,1349.41) ; v1(3665.35,960.63) 3665.35,1007.68 U13.4@3665.55,1007.87 ; C136.2@3672.24,1924.21 v1(3672.24,2003.94) ; C125.2@3678.15,848.43 v1(3678.15,931.1) ; C128.2@3704.72,1676.18 v1(3704.72,1736.22) ; L13.2@3750.98,1956.3 v1(3750.98,2003.94) ; v1(3791.34,1276.57) C143.2@3832.68,1276.57 ; v1(3791.34,1331.69) R114.2@3832.68,1331.69 ; v1(3797.24,1114.17) R116.2@3797.24,1151.57 ; v1(3900.59,688.98) C139.2@3938.98,688.98 ; C140.2@3907.48,1054.13 v1(3948.82,1054.13) ; C141.2@3907.48,1107.28 v1(3948.82,1107.28) ; v1(3917.32,780.51) U15.19@3976.38,780.51 ; U16.2@3948.82,1188.98 v1(3994.09,1188.98) ; R115.2@3986.22,1331.69 v1(4027.56,1331.69) ; v1(4025.59,1370.08) D3.1@4025.59,1415.35 ; v1(4085.63,1393.7) C134.2@4085.63,1436.02 ; v1(4181.1,1078.74) U17.3@4230.32,1078.74 ; v1(4181.1,1320.87) U18.3@4230.32,1320.87 ; v1(4196.85,716.54) U15.1@4196.85,754.92 ; U15.10@4196.85,985.24 v1(4196.85,1019.69) ; v1(4209.65,1799.21) U14.2@4209.65,1848.43 ; C131.2@4209.65,2011.81 v1(4299.21,2011.81) ; v1(4247.05,1570.87) C135.2@4247.05,1610.24 ; v1(4251.97,1221.46) C144.2@4295.28,1221.46 ; v1(4255.91,1487.2) C145.2@4295.28,1487.2 ; C130.2@4284.45,2089.57 v1(4342.52,2089.57) ; v1(4339.57,1645.67) R96.2@4339.57,1687.01 ; C137.2@4369.09,1946.85 v1(4369.09,1992.13) ; R67.2@4537.4,3157.48 v1(4537.4,3196.85) ; v1(4692.91,3047.24) 4718.5,3047.24 4726.38,3039.37 U6.32@4726.38,3013.78 ; U6.26@4771.16,2916.83 v1(4771.65,2917.32) ; U6.25@4771.16,2969 v1(4771.65,2969.49) ; C95.2@4787.4,3181.1 v1(4787.4,3227.36) ; U6.27@4823.33,2916.83 v1(4823.82,2917.32) ; U6.28@4823.33,2969 v1(4823.82,2969.49) ; C96.2@4840.55,3182.09 v1(4840.55,3227.36) ; U6.30@4868.11,2872.05 4868.11,2860.24 4937.01,2791.34 C91.2@5057.09,2791.34 ; R71.2@4900.59,3183.07 v1(4900.59,3227.36) ; R70.2@4944.88,3060.04 v1(4944.88,3099.41) ; 1292.32,2072.84 1302.17,2082.68 J4.93@1339.57,2082.68 v1(1390.75,2082.68) 1389.76,2081.69 1389.76,2062.99 J4.95@1339.57,2062.99 1302.17,2062.99 1292.32,2072.84 ; v1(1443.9,2062.99) 1443.9,2082.68 J4.94@1495.08,2082.68 1539.37,2082.68 1539.37,2062.99 J4.96@1495.08,2062.99 v1(1443.9,2062.99)
  Top w39.37: v1(5604.33,2503.94) VR1.2@5604.33,2645.67
  Bottom w5.91: 2413.39,687.99 C74.2@2413.39,760.83
  Bottom w7.87: C76.2@2334.65,760.83 2334.65,722.44 2369.09,687.99 2413.39,687.99 ; C67.2@2531.5,760.83 2531.5,722.44 2570.87,683.07 v2(2610.24,683.07)
  Bottom w9.84: v2(1685.04,1075.79) 1694.88,1075.79 U35.7@1694.88,1020.67 v1(1694.88,983.27) ; U7.4@2349.41,2461.61 2377.95,2461.61 2377.95,2431.1 v1(2367.13,2431.1) ; U9.4@3005.91,2461.61 3035.43,2461.61 3035.43,2431.1 v1(3021.65,2431.1) ; v1(3435.04,639.76) 3454.72,661.42 U8.4@3474.41,661.42 ; U8.1@3533.46,661.42 v1(3566.93,661.42)
  Bottom w11.81: v1(139.76,791.34) C222.2@139.76,833.66 ; VR6.2@143.7,901.57 v1(143.7,948.82) ; v1(256.89,2583.66) D4.1@384.84,2583.66 ; C161.2@312.99,3017.72 312.99,2976.38 v1(324.8,2964.57) ; v1(323.82,1632.87) 361.22,1632.87 373.03,1644.69 U39.2@411.42,1644.69 ; U42.2@400.59,822.83 400.59,797.24 v1(410.43,787.4) ; C217.2@425.2,1212.6 v1(425.2,1255.91) ; v1(428.15,1370.08) C216.2@466.54,1370.08 ; C220.2@449.8,750 v1(482.28,750) ; v1(496.06,3011.81) C149.2@533.46,3011.81 ; v1(509.84,1976.38) C201.2@509.84,2047.24 ; U40.2@540.35,1175.2 540.35,1149.61 v1(559.06,1130.91) ; v1(547.24,1976.38) 547.24,2000.98 567.91,2021.65 U36.2@599.41,2021.65 ; C212.2@591.54,1743.11 v1(591.54,1789.37) ; v1(604.33,1511.81) VR4.2@604.33,1558.07 ; C199.2@636.81,1937.01 674.21,1937.01 v1(689.96,1921.26) ; v1(645.67,896.65) R194.2@696.85,896.65 ; v1(645.67,993.11) R195.2@696.85,993.11 ; v1(645.67,1089.57) R191.2@696.85,1089.57 ; C209.2@671.26,1581.69 690.94,1581.69 702.76,1593.5 U38.2@728.35,1593.5 ; R190.2@696.85,1186.02 R186.2@696.85,1282.48 R187.2@696.85,1378.94 ; C207.2@764.76,1484.25 v1(832.68,1484.25) ; v1(784.45,1956.69) C203.2@784.45,1996.06 ; C192.2@822.83,822.83 v1(862.2,822.83) ; v2(870.08,2244.09) C147.2@909.45,2244.09 ; v1(936.02,1580.71) C211.2@936.02,1619.09 ; v1(956.69,771.65) U32.1@1019.49,771.65 ; U32.10@1019.49,541.34 1019.69,541.14 v1(1019.69,496.06) ; R200.2@1043.31,941.93 v1(1078.74,941.93) ; R196.2@1043.31,993.11 v1(1078.74,993.11) ; R192.2@1043.31,1044.29 v1(1078.74,1044.29) ; R188.2@1043.31,1095.47 v1(1078.74,1095.47) ; C86.2@1245.08,1463.58 1246.06,1464.57 v2(1246.06,1500.98) ; v1(1361.22,681.1) R24.2@1399.61,681.1 ; v1(1361.22,786.42) R25.2@1399.61,786.42 ; v1(1361.22,890.75) R26.2@1399.61,890.75 ; U2.2@1395.67,1079.72 v1(1443.9,1079.72) ; v1(1443.9,1186.02) R29.2@1480.32,1186.02 ; C198.2@1623.03,1186.02 v1(1623.03,1224.41) ; C189.2@1623.03,1461.61 v1(1623.03,1501.97) ; C197.2@1747.05,1186.02 v1(1747.05,1224.41) ; C188.2@1747.05,1461.61 v1(1747.05,1501.97) ; C47.2@1761.81,1637.8 1761.81,1704.72 v1(1771.65,1704.72) ; C50.2@1765.75,795.28 v1(1765.75,722.44) C45.2@1806.1,722.44 ; v1(1803.15,1511.81) C51.2@1803.15,1568.9 ; v1(1913.39,187.01) 1913.39,-39.37 U28.A4@1915.35,-39.37 ; v2(1980.32,1194.88) C53.2@2021.65,1194.88 ; v2(2137.8,1076.77) C59.2@2137.8,1117.13 ; C39.2@2225.39,1037.4 2231.3,1037.4 2231.3,1015.75 2249.02,998.03 v2(2255.91,998.03) ; U28.A12@2309.06,-39.37 2309.06,187.01 v1(2328.74,187.01) ; v2(2334.65,1194.88) 2358.27,1171.26 2358.27,1155.51 C25.2@2365.16,1155.51 2412.4,1155.51 C27.2@2413.39,1154.53 ; U28.A15@2427.17,-39.37 2427.17,187.01 v1(2446.85,187.01) ; R73.2@2459.65,2677.17 v2(2459.65,2745.08) ; v2(2492.13,879.92) C4.2@2492.13,928.15 ; v2(2492.13,998.03) C2.2@2492.13,1028.54 ; U28.A18@2545.28,-39.37 v1(2545.28,187.01) ; U28.A20@2624.02,-39.37 2624.02,187.01 v1(2643.7,187.01) ; v1(2722.44,187.01) 2742.13,187.01 U28.A23@2742.13,-39.37 ; U28.A24@2781.5,-39.37 2781.5,187.01 v1(2801.18,187.01) ; C57.2@2805.12,1352.36 v2@2805.12,1391.73 ; C37.2@2805.12,1430.12 v2@2805.12,1391.73 ; v2(2806.1,1391.73) v2@2805.12,1391.73 ; v1(2879.92,187.01) 2899.61,187.01 U28.A27@2899.61,-39.37 ; U28.A28@2938.98,-39.37 2938.98,187.01 v1(2958.66,187.01) ; U28.A31@3057.09,-39.37 v1(3057.09,212.6) ; R79.2@3116.14,2677.17 v2(3116.14,2745.08) ; R66.2@3556.1,2965.55 v1(3556.1,3010.83) ; R82.2@4087.6,2967.52 v1(4087.6,3003.94)
  other v1: 236.22,45.28 545.28,45.28 1496.06,45.28 45.28,96.46 1358.27,187.01 1948.82,198.82 2255.91,210.63 1582.68,222.44 545.28,242.13 1958.66,275.59 2101.38,275.59 45.28,293.31 2720.47,318.9 2982.28,349.41 694.88,370.08 891.73,370.08 1088.58,370.08 1285.43,370.08 1496.06,369.09 1714.57,370.08 3622.05,370.08 3818.9,370.08 4015.75,370.08 4212.6,370.08 4409.45,370.08 4606.3,370.08 4803.15,370.08 5000,370.08 5196.85,370.08 5393.7,370.08 5590.55,370.08 5787.4,370.08 5984.25,370.08 6181.1,370.08 6377.95,370.08 3051.18,398.62 3145.67,399.61 3342.52,399.61 6555.12,456.69 354.33,472.44 472.44,472.44 905.51,551.18 1368.11,551.18 2834.65,570.87 3031.5,570.87 1811.02,590.55 1929.13,590.55 3395.67,605.31 3435.04,605.31 4114.17,610.24 4291.34,610.24 1515.75,620.08 354.33,629.92 472.44,629.92 905.51,649.61 6555.12,653.54 5118.11,669.29 5354.33,669.29 4389.76,708.66 6181.1,748.03 3443.9,753.94 6432.09,757.87 5118.11,787.4 5511.81,787.4 4724.41,826.77 6555.12,850.39 45.28,887.8 574.8,904.53 3384.84,905.51 3421.26,905.51 3456.69,905.51 5118.11,905.51 5354.33,905.51 5590.55,905.51 5826.77,905.51 4763.78,944.88 4084.65,954.72 3196.85,956.69 3007.87,968.5 6181.1,984.25 3405.51,1003.94 515.75,1015.75 385.83,1031.5 6555.12,1047.24 3070.87,1051.18 4084.65,1072.83 3562.99,1082.68 6432.09,1102.36 3070.87,1138.78 3543.31,1151.57 362.2,1212.6 5118.11,1220.47 5354.33,1220.47 5590.55,1220.47 6062.99,1220.47 6555.12,1244.09 615.16,1250 407.48,1299.21 6427.17,1338.58 4409.45,1358.27 6555.12,1440.94 4645.67,1456.69 4881.89,1456.69 5118.11,1456.69 5354.33,1456.69 5590.55,1456.69 5826.77,1456.69 6181.1,1456.69 45.28,1466.54 167.32,1466.54 6427.17,1535.43 4015.75,1594.49 4409.45,1594.49 3897.64,1614.17 6555.12,1637.8 4645.67,1692.91 4881.89,1692.91 5118.11,1692.91 5354.33,1692.91 5590.55,1692.91 5826.77,1692.91 6062.99,1692.91 6299.21,1692.91 682.09,1698.82 4015.75,1712.6 6432.09,1732.28 2133.86,1748.03 2133.86,1787.4 787.4,1791.34 2677.17,1791.34 3051.18,1811.02 3700.79,1811.02 1102.36,1830.71 6555.12,1834.65 1771.65,1840.55 3080.71,1889.76 411.42,1893.7 523.62,1893.7 3887.8,1909.45 2677.17,1917.32 6427.17,1924.21 4606.3,1929.13 5118.11,1929.13 5826.77,1929.13 6062.99,1929.13 6299.21,1929.13 3129.92,1988.19 6555.12,2031.5 45.28,2062.99 234.25,2074.8 3946.85,2086.61 196.85,2125.98 6427.17,2130.91 4606.3,2165.35 4881.89,2165.35 5118.11,2165.35 5354.33,2165.35 5590.55,2165.35 5826.77,2165.35 6062.99,2165.35 6299.21,2165.35 6555.12,2228.35 2076.77,2322.83 2549.21,2322.83 2736.22,2322.83 3208.66,2322.83 3543.31,2322.83 3720.47,2322.83 4015.75,2322.83 4330.71,2322.83 6432.09,2322.83 3346.46,2362.2 2096.46,2391.73 2224.41,2391.73 2401.57,2391.73 2529.53,2391.73 2746.06,2391.73 2883.86,2391.73 3056.1,2391.73 3179.13,2391.73 6555.12,2425.2 2096.46,2431.1 2224.41,2431.1 2258.86,2431.1 2401.57,2431.1 2529.53,2431.1 2746.06,2431.1 2883.86,2431.1 2918.31,2431.1 3056.1,2431.1 3179.13,2431.1 5826.77,2440.94 6062.99,2440.94 635.83,2557.09 730.32,2557.09 824.8,2556.1 3021.65,2563.98 2362.2,2568.9 1220.47,2598.43 3346.46,2598.43 45.28,2639.76 824.8,2651.57 3828.74,2657.48 6557.09,2687.01 1220.47,2692.91 3809.06,2696.85 3828.74,2736.22 635.83,2746.06 730.32,2746.06 824.8,2746.06 3809.06,2775.59 4960.63,2779.53 5147.64,2779.53 3346.46,2795.28 4940.94,2814.96 5177.17,2814.96 61.02,2883.86 6557.09,2883.86 1220.47,2933.07 3690.94,2933.07 3740.16,2933.07 3789.37,2933.07 4035.43,2933.07 2952.76,2952.76 3149.61,2952.76 3690.94,2982.28 3740.16,2982.28 3789.37,2982.28 4035.43,2982.28 433.07,3001.97 3690.94,3031.5 3740.16,3031.5 3789.37,3031.5 3937.01,3031.5 3986.22,3031.5 4035.43,3031.5 433.07,3051.18 1240.16,3051.18 1633.86,3051.18 1889.76,3051.18 4478.35,3061.02 4517.72,3061.02 4557.09,3061.02 4596.46,3061.02 4635.83,3061.02 61.02,3080.71 3543.31,3080.71 3592.52,3080.71 3641.73,3080.71 3690.94,3080.71 3740.16,3080.71 3789.37,3080.71 3937.01,3080.71 3986.22,3080.71 4035.43,3080.71 4084.65,3080.71 4133.86,3080.71 6557.09,3080.71 157.48,3100.39 236.22,3100.39 433.07,3100.39 3543.31,3129.92 3592.52,3129.92 3641.73,3129.92 3690.94,3129.92 3740.16,3129.92 3789.37,3129.92 3838.58,3129.92 3887.8,3129.92 3937.01,3129.92 3986.22,3129.92 4035.43,3129.92 4084.65,3129.92 4133.86,3129.92 4429.13,3129.92 4478.35,3129.92 433.07,3149.61 501.97,3149.61 1141.73,3149.61 1338.58,3149.61 1535.43,3149.61 1732.28,3149.61 4960.63,3169.29 818.9,3177.17 897.64,3177.17 157.48,3179.13 236.22,3179.13 3543.31,3179.13 3592.52,3179.13 3641.73,3179.13 3690.94,3179.13 3740.16,3179.13 3789.37,3179.13 3838.58,3179.13 3887.8,3179.13 3937.01,3179.13 3986.22,3179.13 4035.43,3179.13 4084.65,3179.13 4133.86,3179.13 4183.07,3179.13 4232.28,3179.13 4281.5,3179.13 4330.71,3179.13 4379.92,3179.13 4429.13,3179.13 4478.35,3179.13 61.02,3277.56 257.87,3277.56 454.72,3277.56 651.57,3277.56 848.43,3277.56 1045.28,3277.56 1242.13,3277.56 1438.98,3277.56 1635.83,3277.56 1832.68,3277.56 2029.53,3277.56 2226.38,3277.56 2423.23,3277.56 2620.08,3277.56 2816.93,3277.56 3013.78,3277.56 3210.63,3277.56 3407.48,3277.56 3604.33,3277.56 3801.18,3277.56 3998.03,3277.56 4194.88,3277.56 4391.73,3277.56 4588.58,3277.56 4785.43,3277.56 4982.28,3277.56 5179.13,3277.56 5375.98,3277.56 5572.83,3277.56 5769.69,3277.56 5966.54,3277.56 6163.39,3277.56 6360.24,3277.56 61.02,3474.41 454.72,3474.41 61.02,3671.26 454.72,3671.26
  other v2: 3503.94,696.85 1685.04,1354.33 2313.98,2491.14 2970.47,2491.14 257.87,2676.18 375.98,2704.72 240.16,2731.3
GNSS_BOOT: U1.AF9 U35.5 | length 486
  Top w11.81: v2(1901.57,1352.36) U1.AF9@1921.26,1332.68
  Inner Layer 6 w5.91: v1(1771.65,1035.43) 1829.72,1093.5 1829.72,1344.49 1837.6,1352.36 v2(1901.57,1352.36)
  Bottom w5.91: U35.5@1730.32,1056.1 1750.98,1056.1 v1(1771.65,1035.43)
GNSS_PPS: R105.2 U1.AF6 | length 3028.1
  Top w5.91: R105.2@4335.63,974.41 v1(4381.89,974.41)
  Top w11.81: v2(1901.57,1470.47) U1.AF6@1921.26,1450.79
  Inner Layer 3 w5.91: v2(1901.57,1470.47) 1921.26,1490.16 2581.69,1490.16 2590.55,1499.02 2590.55,1636.81 2601.38,1647.64 3009.84,1647.64 3059.06,1696.85 3188.98,1696.85 3722.44,1163.39 4192.91,1163.39 v1(4381.89,974.41)
GNSS_RESET: U1.AF7 U35.4 | length 507.5
  Top w11.81: v2(1901.57,1431.1) U1.AF7@1921.26,1411.42
  Inner Layer 6 w5.91: v1(1771.65,1069.88) 1817.91,1116.14 1817.91,1385.83 1863.19,1431.1 v2(1901.57,1431.1)
  Bottom w5.91: U35.4@1730.32,1075.79 1750,1075.79 v1(1771.65,1069.88)
GNSS_RX: U1.AF4 U21.2 | length 1237.6
  Top w5.91: v1(1219.49,1834.65) U21.2@1219.49,1897.64
  Top w11.81: v2(1901.57,1549.21) U1.AF4@1921.26,1529.53
  Inner Layer 6 w5.91: v1(1219.49,1834.65) 1187.01,1802.17 1187.01,1471.46 1204.72,1453.74 1803.15,1453.74 1820.87,1453.74 1834.65,1467.52 1872.05,1504.92 1872.05,1519.69 v2(1901.57,1549.21)
GNSS_TX: R107.2 U1.AF3 | length 3193
  Top w5.91: R107.2@4335.63,908.46 v1(4377.95,908.46)
  Top w11.81: v2(1901.57,1588.58) U1.AF3@1921.26,1568.9
  Inner Layer 3 w5.91: v2(1901.57,1588.58) 1935.04,1588.58 1960.63,1562.99 1960.63,1540.35 1971.46,1529.53 2540.35,1529.53 2551.18,1540.35 2551.18,1672.24 2606.3,1727.36 3252.95,1727.36 3358.27,1622.05 3391.73,1622.05 3793.31,1220.47 4195.87,1220.47 4419.29,997.05 4419.29,949.8 v1(4377.95,908.46)
GPIO_0: C193.1 TP1.1 U1.F1 | length 1606.6
  Top w5.91: U1.F1@2708.66,1647.64 2708.66,2200.79 2667.32,2242.13 2667.32,2317.91 2667.32,2827.76 2782.48,2942.91 C193.1@2782.48,3137.8 2781.5,3138.78 TP1.1@2781.5,3188.98
GPIO_1: C194.1 TP2.1 U1.E1 | length 1652.9
  Top w5.91: U1.E1@2748.03,1647.64 2720.47,1675.2 2720.47,2205.71 2680.12,2246.06 2680.12,2321.85 2680.12,2823.82 2880.91,3024.61 C194.1@2880.91,3139.76 2881.5,3140.35 TP2.1@2881.5,3188.98
GPIO_2: C195.1 TP3.1 U1.C1 | length 1750.6
  Top w5.91: U1.C1@2826.77,1647.64 2826.77,1695.87 2812.99,1709.65 2755.91,1709.65 2732.28,1733.27 2732.28,2210.63 2691.93,2250.98 2691.93,2326.77 2691.93,2818.9 2981.3,3108.27 C195.1@2981.3,3139.76 2981.5,3139.96 TP3.1@2981.5,3188.98
GPIO_3: C196.1 TP4.1 U1.B1 | length 1855.8
  Top w5.91: U1.B1@2866.14,1647.64 2866.14,1673.23 2817.91,1721.46 2760.83,1721.46 2744.09,1738.19 2744.09,2215.55 2703.74,2255.91 2703.74,2331.69 2703.74,2813.98 2951.77,3062.01 3049.21,3062.01 3081.69,3094.49 C196.1@3081.69,3139.76 3081.5,3139.96 TP4.1@3081.5,3188.98
GPS_POWER: C146.1 J3.2 L14.1 R123.1 | length 294.4
  Top w5.91: J3.2@1139.17,2206.69 1192.91,2206.69 v1(1209.65,2189.96)
  Bottom w5.91: C146.1@1139.76,2227.36 R123.1@1193.9,2227.36 ; v1(1209.65,2189.96) 1193.9,2205.71 R123.1@1193.9,2227.36 ; L14.1@1247.05,2153.54 1247.05,2213.58 1233.27,2227.36 R123.1@1193.9,2227.36
H_CLK_OSC: R113.2 R117.2 U15.8 | length 349.6
  Top w5.91: R113.2@4067.91,1163.39 R117.2@4123.03,1163.39 4123.03,948.82 4137.8,934.06 U15.8@4196.85,934.06
H_DCLS_IN0: R185.1 R186.1 R187.1 U36.7 | length 1044.9
  Top w5.91: R185.1@893.7,1095.47 v1(893.7,1133.86)
  Inner Layer 6 w5.91: v1(750,1956.69) 750,1501.97 v1(809.06,1442.91)
  Bottom w5.91: U36.7@715.55,2021.65 736.22,2021.65 750,2007.87 v1(750,1956.69) ; v1(809.06,1442.91) R187.1@809.06,1378.94 R186.1@809.06,1282.48 865.16,1282.48 893.7,1253.94 v1(893.7,1133.86)
H_DCLS_IN1: R189.1 R190.1 R191.1 U38.7 | length 820.3
  Top w5.91: v1(856.3,1044.29) R189.1@893.7,1044.29
  Inner Layer 6 w5.91: v1(856.3,1044.29) 856.3,1153.54 889.76,1187.01 v1(889.76,1580.71)
  Bottom w5.91: R190.1@809.06,1186.02 R191.1@809.06,1089.57 844.49,1089.57 856.3,1077.76 v1(856.3,1044.29) ; U38.7@844.49,1593.5 876.97,1593.5 v1(889.76,1580.71)
H_DCLS_IN2: R193.1 R194.1 R195.1 U40.7 | length 872.5
  Top w5.91: v1(856.3,993.11) R193.1@893.7,993.11
  Inner Layer 6 w5.91: v1(540.35,1326.77) 508.86,1295.28 508.86,1061.02 554.13,1015.75 833.66,1015.75 v1(856.3,993.11)
  Bottom w5.91: U40.7@540.35,1291.34 v1(540.35,1326.77) ; R194.1@809.06,896.65 809.06,989.17 R195.1@812.99,993.11 ; R195.1@809.06,993.11 R195.1@812.99,993.11 ; v1(856.3,993.11) R195.1@812.99,993.11
H_DCLS_IN3: R197.1 R198.1 R199.1 U42.7 | length 691.3
  Top w5.91: R198.1@809.06,1038.39 R199.1@809.06,941.93 v1(856.3,941.93) R197.1@893.7,941.93
  Inner Layer 3 w5.91: v1(400.59,978.35) 606.3,978.35 619.09,965.55 691.93,965.55 715.55,941.93 v1(856.3,941.93)
  Bottom w5.91: U42.7@400.59,938.98 v1(400.59,978.35)
H_DCLS_OUT0: R163.2 R164.2 R165.2 R166.2 U36.5 | length 1941.5
  Inner Layer 4 w5.91: v1(505.91,787.4) 647.64,787.4 782.48,922.24 782.48,1183.07 745.08,1220.47 745.08,1875 810.04,1939.96 810.04,2047.24 v1(784.45,2072.83)
  Bottom w5.91: v1(505.91,787.4) R163.2@554.13,787.4 R164.2@554.13,691.93 R165.2@554.13,595.47 R166.2@554.13,499.02 ; U36.5@715.55,2072.83 v1(784.45,2072.83)
H_DCLS_OUT1: R167.2 R168.2 R169.2 R170.2 U38.5 | length 1555.3
  Inner Layer 6 w5.91: v1(844.49,1688.98) 877.95,1688.98 959.65,1607.28 959.65,1153.54 987.2,1125.98 1217.52,1125.98 1249.02,1094.49 v1(1249.02,850.39)
  Bottom w5.91: U38.5@844.49,1644.69 v1(844.49,1688.98) ; R167.2@1249.02,500 R168.2@1249.02,595.47 R169.2@1249.02,690.94 R170.2@1249.02,787.4 v1(1249.02,850.39)
H_DCLS_OUT2: R171.2 R172.2 R173.2 R174.2 U40.5 | length 1594
  Top w5.91: R173.2@1249.02,500 R172.2@1249.02,595.47 R174.2@1249.02,690.94 R171.2@1249.02,787.4 v1(1303.15,787.4)
  Inner Layer 3 w5.91: v1(454.72,1291.34) 454.72,1133.86 573.82,1014.76 872.05,1014.76 901.57,985.24 901.57,911.42 966.54,846.46 966.54,803.15 982.28,787.4 v1(1303.15,787.4)
  Bottom w5.91: v1(454.72,1291.34) U40.5@489.17,1291.34
H_DCLS_OUT3: R175.2 R176.2 R177.2 R178.2 U42.5 | length 663.5
  Top w5.91: v1(349.41,978.35) 410.43,917.32 512.8,917.32 554.13,875.98 R178.2@554.13,787.4 R177.2@554.13,691.93 R176.2@554.13,595.47 R175.2@554.13,499.02
  Bottom w5.91: U42.5@349.41,938.98 v1(349.41,978.35)
H_GNSS_BOOT: J3.7 R126.1 U35.10 | length 2092.5
  Top w5.91: v1(946.85,2442.91) J3.7@1010.43,2442.91
  Inner Layer 6 w5.91: v1(946.85,2442.91) 919.29,2415.35 919.29,2266.73 970.47,2215.55 1119.09,2215.55 1157.48,2177.17 1157.48,1452.76 1291.34,1318.9 1458.66,1318.9 1473.43,1304.13 1473.43,1082.68 1500.98,1055.12 1578.74,1055.12 v1(1598.43,1035.43)
  Bottom w5.91: v1(946.85,2442.91) R126.1@995.08,2442.91 ; v1(1598.43,1035.43) 1619.09,1056.1 U35.10@1639.76,1056.1
H_GNSS_PPS: J3.6 R124.2 U15.11 | length 4532.1
  Top w5.91: J3.6@1139.17,2364.17 v1(1209.65,2364.17) ; U15.11@3976.38,985.24 v1(4031.5,985.24)
  Inner Layer 3 w5.91: v1(1209.65,2364.17) 1150.59,2305.12 1150.59,2098.43 1252.95,1996.06 1470.47,1996.06 1488.19,1978.35 2191.93,1978.35 2201.77,1988.19 2201.77,2044.29 2216.54,2059.06 2530.51,2059.06 2562.01,2027.56 3015.75,2027.56 3170.28,1873.03 3437.99,1873.03 3530.51,1965.55 3892.72,1965.55 3909.45,1982.28 v1(3962.6,1982.28)
  Inner Layer 6 w5.91: v1(3962.6,1982.28) 3962.6,1155.51 4031.5,1086.61 v1(4031.5,985.24)
  Bottom w5.91: R124.2@1169.29,2364.17 v1(1209.65,2364.17)
H_GNSS_RESET: J3.4 R123.2 U35.11 | length 1775.2
  Top w5.91: J3.4@1139.17,2285.43 1193.9,2285.43 v1(1209.65,2301.18)
  Inner Layer 6 w5.91: v1(1209.65,2301.18) 1233.27,2277.56 1233.27,2146.65 1169.29,2082.68 1169.29,1457.68 1258.86,1368.11 1463.58,1368.11 1487.2,1344.49 1487.2,1099.41 1516.73,1069.88 v1(1598.43,1069.88)
  Bottom w5.91: R123.2@1193.9,2264.76 1193.9,2285.43 v1(1209.65,2301.18) ; v1(1598.43,1069.88) 1620.08,1075.79 U35.11@1639.76,1075.79
H_GNSS_RX: J3.5 U21.4 | length 845.1
  Top w5.91: v1(946.85,2364.17) J3.5@1010.43,2364.17 ; v1(1256.89,1956.69) U21.4@1256.89,2000
  Inner Layer 6 w5.91: v1(946.85,2364.17) 971.46,2339.57 1226.38,2339.57 1256.89,2309.06 1256.89,2136.81 1192.91,2072.83 1192.91,2020.67 v1(1256.89,1956.69)
H_GNSS_TX: J3.3 R125.1 U15.13 | length 4609.2
  Top w5.91: v1(946.85,2285.43) J3.3@1010.43,2285.43 ; U15.13@3976.38,934.06 v1(4031.5,934.06)
  Inner Layer 3 w5.91: v1(946.85,2285.43) 1087.6,2285.43 1138.78,2234.25 1138.78,2093.5 1248.03,1984.25 1465.55,1984.25 1483.27,1966.54 2196.85,1966.54 2213.58,1983.27 2213.58,2038.39 2222.44,2047.24 2525.59,2047.24 2557.09,2015.75 3010.83,2015.75 3165.35,1861.22 3442.91,1861.22 3535.43,1953.74 v1(3933.07,1953.74)
  Inner Layer 6 w5.91: v1(3933.07,1953.74) 3933.07,1163.39 3995.08,1101.38 3995.08,970.47 v1(4031.5,934.06)
  Bottom w5.91: v1(946.85,2285.43) R125.1@995.08,2285.43
H_OSC_BITE: OSC1.6 R102.2 U15.4 U19.4 | length 1435.2
  Top w5.91: U15.4@4196.85,831.69 4245.08,831.69 4251.97,824.8 4251.97,799.21 4262.8,788.39 R102.2@4299.21,788.39 4381.89,788.39 4406.5,763.78 OSC1.6@4578.74,763.78
  Bottom w5.91: OSC1.6@4578.74,763.78 4772.64,763.78 4812.01,724.41 5477.95,724.41 U19.4@5544.88,657.48
H_OSC_PPS_IN: OSC1.9 OSC4.B R101.1 U18.4 U19.9 | length 2687.1
  Top w5.91: U18.4@4332.68,1320.87 4375.98,1320.87 OSC1.9@4578.74,1118.11 ; v1(4694.88,1118.11) v1(4694.88,1279.53) v1(4694.88,1758.86)
  Bottom w5.91: OSC1.9@4578.74,1118.11 v1(4694.88,1118.11) ; v1(4694.88,1279.53) R101.1@4750.98,1279.53 ; v1(4694.88,1758.86) 5346.26,1758.86 U19.9@5544.88,1957.48 5742.52,1759.84 OSC4.B@6074.8,1759.84
H_OSC_PPS_OUT: OSC1.10 R103.1 R111.1 U15.2 U19.10 | length 3088.6
  Top w5.91: U15.2@4196.85,780.51 4240.16,780.51 4251.97,768.7 4251.97,670.28 4280.51,641.73 4541.34,641.73 4656.5,756.89 4656.5,1158.46 OSC1.10@4578.74,1236.22 v1(4578.74,1824.8)
  Bottom w5.91: OSC1.10@4578.74,1236.22 4634.84,1180.12 R103.1@4750.98,1180.12 ; v1(4578.74,1824.8) 4609.25,1824.8 4609.65,1825.2 5212.6,1825.2 U19.10@5344.88,1957.48 5345.28,1957.48 5502.95,2115.16 R111.1@5628.94,2115.16
H_OSC_RX: OSC1.8 U17.4 U19.6 | length 1786.7
  Top w5.91: U17.4@4332.68,1078.74 4500,1078.74 OSC1.8@4578.74,1000
  Bottom w5.91: OSC1.8@4578.74,1000 5602.36,1000 U19.6@5944.88,657.48
H_OSC_SCL: OSC3.1 OSC4.2 R121.2 U20.6 | length 4243.2
  Top w5.91: U20.6@3251.97,1150.59 3251.97,1173.23 3260.83,1182.09 v1(3325.79,1182.09) R121.2@3325.79,1141.73 ; OSC3.1@5944.88,779.92 5869.39,855.41 5869.39,1287.4 5979.99,1398 5988.55,1398 OSC4.2@6074.8,1484.25
  Inner Layer 3 w5.91: v1(3325.79,1182.09) 3325.79,1145.67 3357.28,1114.17 3615.16,1114.17 3769.69,959.65 3911.42,959.65 3987.2,1035.43 4137.8,1035.43 4292.32,880.91 4426.18,880.91 4462.6,917.32 4462.6,1035.43 4494.09,1066.93 5657.48,1066.93 OSC4.2@6074.8,1484.25
H_OSC_SDA: OSC3.2 OSC4.3 R122.2 U20.5 | length 3613
  Top w5.91: U20.5@3273.62,1150.59 3273.62,1098.43 3285.43,1086.61 R122.2@3325.79,1086.61 v1(3325.79,1047.24) ; OSC3.2@5944.88,1129.92 6074.8,1000 OSC4.3@6074.8,663.39
  Top w11.81: OSC4.3@6074.8,657.48 OSC4.3@6074.8,663.39
  Inner Layer 3 w5.91: v1(3325.79,1047.24) 3665.35,1047.24 3766.73,945.87 3932.09,945.87 4001.97,1015.75 4128.94,1015.75 4286.42,858.27 4438.98,858.27 4485.24,904.53 4485.24,1024.61 4511.81,1051.18 5866.14,1051.18 OSC3.2@5944.88,1129.92
H_OSC_TX: OSC1.7 U15.6 U19.5 | length 1641.4
  Top w5.91: U15.6@4196.85,882.87 4427.17,882.87 4428.15,881.89 OSC1.7@4578.74,881.89
  Bottom w5.91: OSC1.7@4578.74,881.89 4769.69,881.89 4804.13,847.44 5554.92,847.44 U19.5@5744.88,657.48
H_USB_SPI_CLK: U22.8 U25.2 | length 158.4
  Top w5.91: U25.2@649.61,2351.38 v1(675.2,2351.38) ; v2(687.99,2425.2) 698.82,2436.02 U22.8@698.82,2474.41
  Inner Layer 6 w5.91: v1(675.2,2351.38) 675.2,2375 687.99,2387.8 v2(687.99,2425.2)
H_USB_SPI_CSN: U22.14 U25.4 | length 293.5
  Top w5.91: U25.4@610.24,2351.38 610.24,2368.11 639.76,2397.64 v1(666.34,2397.64) ; U22.14@793.31,2474.41 793.31,2439.96 v2(808.07,2425.2)
  Inner Layer 3 w5.91: v1(666.34,2397.64) 780.51,2397.64 v2(808.07,2425.2)
H_USB_SPI_CTRL: U22.18 U25.5 | length 379.4
  Top w5.91: U25.5@590.55,2351.38 v1(590.55,2389.76) ; v2(856.3,2425.2) U22.18@856.3,2474.41
  Inner Layer 3 w5.91: v1(590.55,2389.76) 632.87,2389.76 646.65,2375.98 807.09,2375.98 v2(856.3,2425.2)
H_USB_SPI_MISO: U22.13 U26.4 | length 108.4
  Top w5.91: U22.13@777.56,2474.41 777.56,2438.98 787.4,2429.13 787.4,2381.89 U26.4@799.21,2381.89
H_USB_SPI_MOSI: U22.9 U25.3 | length 181.2
  Top w5.91: U25.3@629.92,2351.38 629.92,2368.11 637.8,2375.98 677.17,2375.98 710.63,2409.45 710.63,2437.01 714.57,2440.94 U22.9@714.57,2474.41
ID0: R23.2 R31.1 U1.AF11 | length 503.4
  Top w11.81: v2(1901.57,1273.62) U1.AF11@1921.26,1253.94
  Inner Layer 3 w5.91: v1(1555.12,1316.93) 1598.43,1273.62 v2(1901.57,1273.62)
  Bottom w5.91: R31.1@1517.72,1293.31 R23.2@1517.72,1345.47 1543.31,1345.47 1555.12,1333.66 v1(1555.12,1316.93)
ID1: R22.2 R30.1 U1.AF12 | length 488.3
  Top w5.91: R22.2@1517.72,1345.47 R30.1@1517.72,1293.31 1541.34,1293.31 v1(1555.12,1279.53)
  Top w11.81: v2(1901.57,1234.25) U1.AF12@1921.26,1214.57
  Inner Layer 3 w5.91: v1(1555.12,1279.53) 1572.83,1261.81 1874.02,1261.81 v2(1901.57,1234.25)
ID2: R21.2 R29.1 U1.AF13 | length 492.2
  Top w11.81: v2(1901.57,1194.88) U1.AF13@1921.26,1175.2
  Inner Layer 3 w5.91: v1(1555.12,1239.17) 1594.49,1239.17 1605.32,1250 1846.46,1250 v2(1901.57,1194.88)
  Bottom w5.91: R29.1@1517.72,1186.02 R21.2@1517.72,1239.17 v1(1555.12,1239.17)
ID3: R20.2 R28.1 U1.AF14 | length 477.5
  Top w5.91: R20.2@1517.72,1239.17 R28.1@1517.72,1186.02 v1(1555.12,1186.02)
  Top w11.81: v2(1901.57,1155.51) U1.AF14@1921.26,1135.83
  Inner Layer 3 w5.91: v1(1555.12,1186.02) 1871.06,1186.02 v2(1901.57,1155.51)
INTVCC: U6.2 U6.20 | length 342.4
  Top w5.91: v1(4654.53,2994.09) v1@4656,2992.62
  Top w9.84: v1@4656,2992.62 4676.18,2972.44 U6.2@4722.44,2972.44 ; U6.20@4826.77,3017.72 4826.77,3057.09 v2(4836.61,3066.93)
  Bottom w9.84: v1(4654.53,2994.09) 4763.78,2994.09 v2(4836.61,3066.93)